# Altium PCB PCB1.pcbdoc (part 2 of 3)
Units mm, origin at the board's own origin, x right, y up, seen from the top; angles counter-clockwise.
Board outline 85.01 x 107.37 mm, 4 copper layers (Top Layer, Inner1, Inner2, Bottom Layer); 103 components, 145 nets, 649 pads, 270 vias.
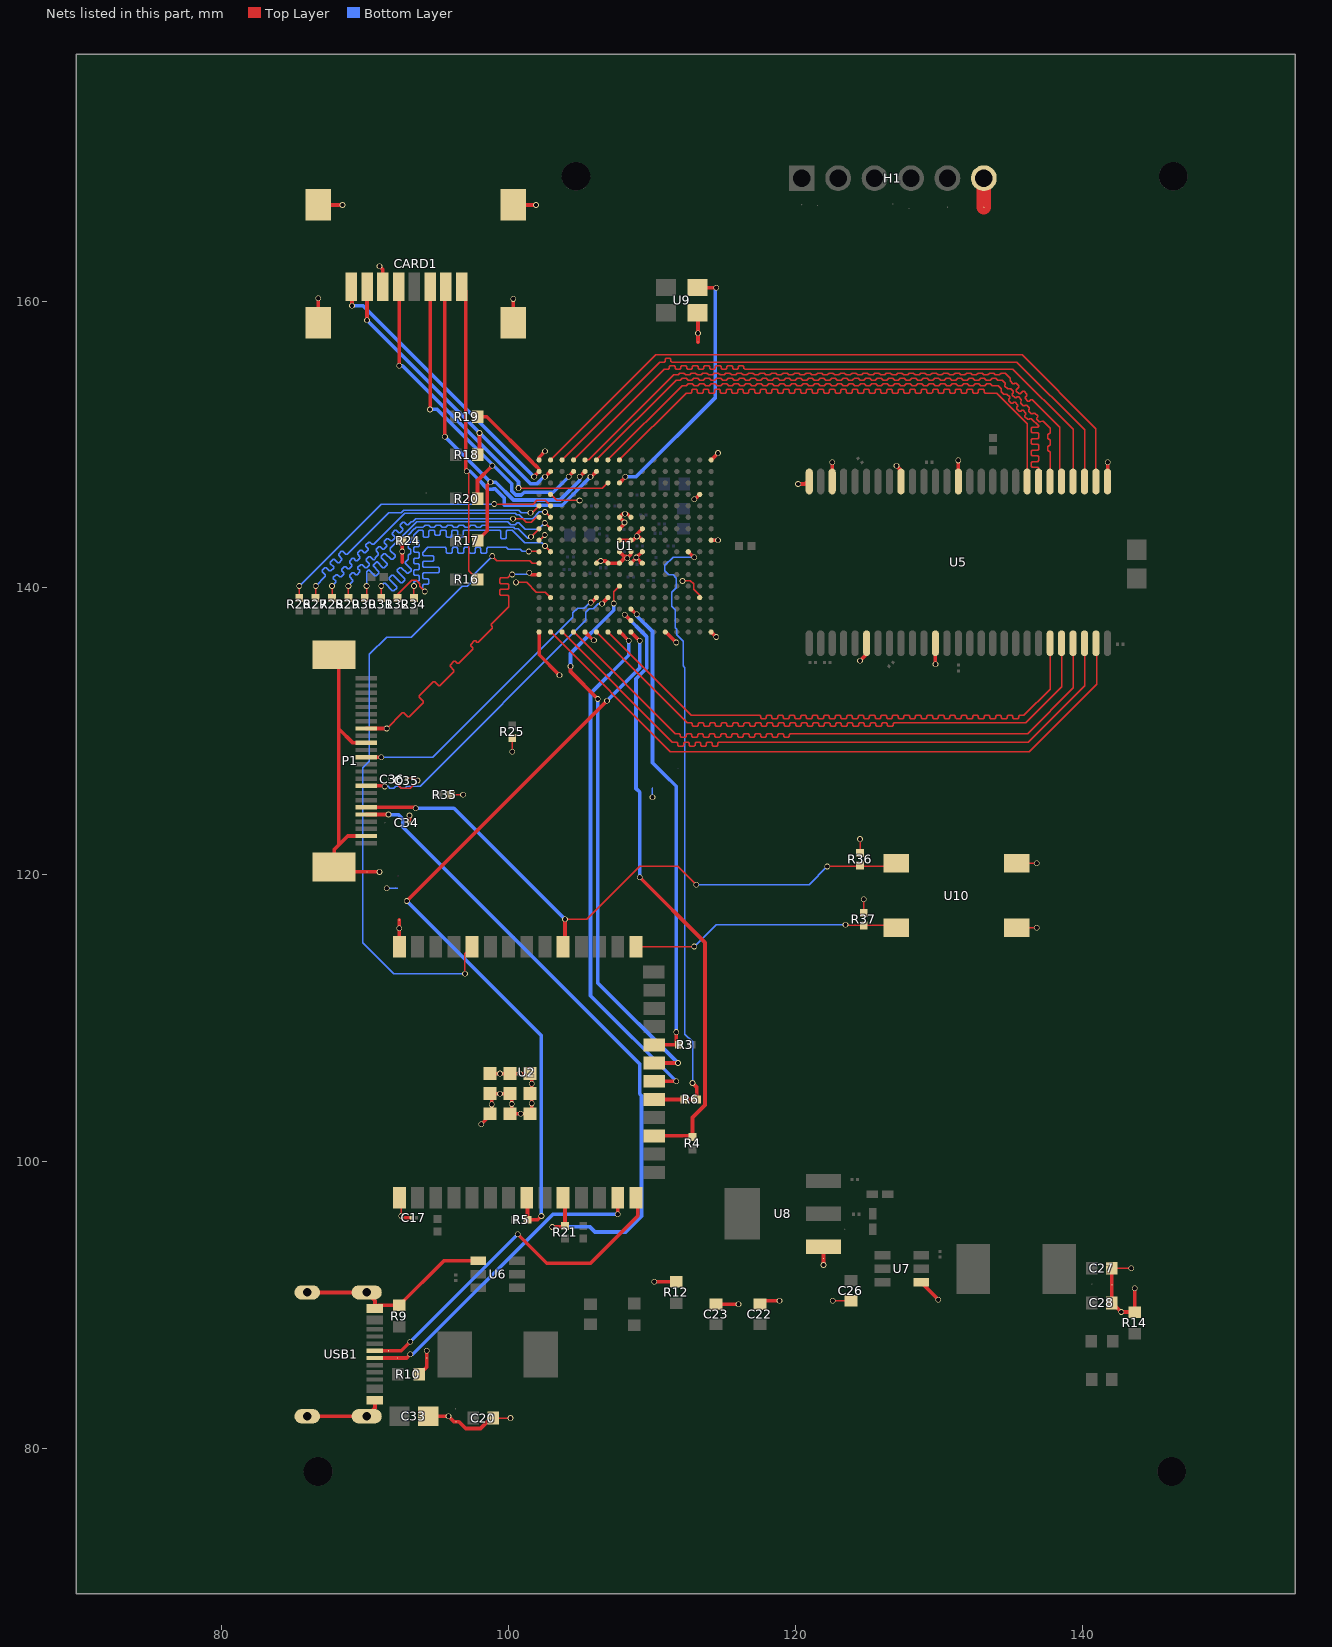
[diagram p4: the nets of this part, all layers, seen from the top]

## Via types
v1: diameter 0.4, hole 0.3, Top Layer to Bottom Layer, 254 vias
v2: diameter 0.61, hole 0.305, Top Layer to Bottom Layer, 16 vias

## Nets (pads, with @x,y where several pads share a name; then routed paths per layer and width w, separated by ;. In a path a pad name is that pad's centre, name@x,y a point inside that pad or via, vN(x,y) a via of type N, cw(c..) or ccw(c..) an arc to the next point about the centre after c; other vN are vias at no path point) (continued)
CCLK: R6.1 R6.2 U1.J14 U2.19 | length 44.3
  Top Layer w0.254: U2.19@110.292,104.318 R6.1@112.267,104.318 R6.2@113.133,104.318 113.133,105.155 v1(112.827,105.461) ; U1.J14@112.528,142.526 112.911,142.143 v1(112.954,142.143)
  Bottom Layer w0.1: v1(112.827,105.461) 112.827,108.34 112.296,108.871 112.296,134.44 112.171,134.565 112.171,136.277 111.714,136.734 111.714,137.124 111.615,137.223 111.615,138.479 111.386,138.708 111.386,139.707 111.705,140.026 111.705,140.68 111.47,140.915 111.184,140.915 110.899,141.199 110.899,141.567 111.475,142.143 v1(112.954,142.143)
CRYSTAL: U1.C8 U9.3 | length 18.2
  Top Layer w0.254: U1.C8@107.728,147.326 108.128,147.726 v1(108.128,147.752) ; U9.3@113.165,160.946 v1(114.478,160.946)
  Bottom Layer w0.254: v1(108.128,147.752) 108.89,147.752 114.425,153.287 114.425,160.893 v1(114.478,160.946)
D0: R26.1 U1.E2 | length 21
  Top Layer w0.1: R26.1@85.395,139.295 v1(85.395,140.132) ; v1@98.984,145.847 101.709,145.847 101.97,146.108 102.546,146.108 U1.E2@102.928,145.726
  Bottom Layer w0.1: v1(85.395,140.132) 91.11,145.847 v1(98.994,145.847)
D1: R27.1 U1.E1 | length 21.1
  Top Layer w0.1: R27.1@86.538,139.295 v1(86.538,140.132) ; v1(101.524,145.241) 101.643,145.241 U1.E1@102.128,145.726
  Bottom Layer w0.1: v1(86.538,140.132) 87.223,140.817 87.223,140.917 87.006,141.135 87.006,141.235 87.188,141.417 87.288,141.417 87.506,141.2 87.606,141.2 87.789,141.383 87.789,141.483 87.571,141.7 87.571,141.8 87.754,141.983 87.854,141.983 88.072,141.766 88.172,141.766 88.354,141.948 88.354,142.048 88.137,142.266 88.137,142.366 88.32,142.549 88.42,142.549 88.637,142.331 88.737,142.331 91.647,145.241 92.507,145.241 92.685,145.419 100.717,145.419 100.895,145.241 v1(101.524,145.241)
D2: R28.1 U1.F2 | length 21.5
  Top Layer w0.1: R28.1@87.681,139.295 v1(87.681,140.132) ; v1(102.537,145.296) 102.558,145.296 U1.F2@102.928,144.926
  Bottom Layer w0.1: v1(87.681,140.132) 87.935,140.386 87.935,140.486 87.781,140.64 87.781,140.74 87.964,140.923 88.064,140.923 88.218,140.769 88.318,140.769 88.501,140.952 88.501,141.052 88.347,141.206 88.347,141.306 88.53,141.489 88.63,141.489 88.784,141.335 88.884,141.335 89.066,141.517 89.066,141.617 88.912,141.771 88.912,141.871 89.095,142.054 89.195,142.054 89.349,141.9 89.449,141.9 89.632,142.083 89.632,142.183 89.478,142.337 89.478,142.437 89.661,142.62 89.761,142.62 89.915,142.466 90.015,142.466 90.198,142.649 90.198,142.749 90.044,142.903 90.044,143.003 90.227,143.186 90.327,143.186 90.481,143.032 90.581,143.032 92.768,145.219 100.465,145.219 100.575,145.11 100.743,145.11 101.014,144.839 101.691,144.839 102.147,145.296 v1(102.537,145.296)
D3: R29.1 U1.F1 | length 20.7
  Top Layer w0.1: R29.1@88.824,139.295 v1(88.824,140.132) ; v1(100.299,144.817) 100.998,144.817 101.23,144.585 101.564,144.585 101.922,144.943 102.111,144.943 U1.F1@102.128,144.926
  Bottom Layer w0.1: v1(88.824,140.132) 89.143,140.451 89.143,140.551 88.926,140.769 88.926,140.869 89.109,141.052 89.209,141.052 89.328,140.932 89.428,140.932 89.611,141.115 89.611,141.215 89.491,141.334 89.491,141.434 89.674,141.617 89.774,141.617 89.992,141.4 90.092,141.4 90.275,141.583 90.275,141.683 90.057,141.9 90.057,142 90.24,142.183 90.34,142.183 90.558,141.966 90.658,141.966 90.71,142.018 90.71,142.114 90.922,142.327 90.922,142.427 90.753,142.596 90.753,142.696 90.936,142.879 91.036,142.879 91.205,142.709 91.305,142.709 91.488,142.892 91.488,142.992 91.319,143.162 91.319,143.262 91.501,143.444 91.601,143.444 91.771,143.275 91.871,143.275 92.054,143.458 92.054,143.558 91.884,143.727 91.884,143.827 92.067,144.01 92.167,144.01 92.336,143.841 92.436,143.841 92.619,144.024 92.619,144.124 92.45,144.293 92.45,144.393 92.633,144.576 92.733,144.576 92.902,144.406 93.002,144.406 93.211,144.615 93.307,144.615 93.509,144.817 v1(100.299,144.817)
D4: R30.1 U1.G2 | length 21.3
  Top Layer w0.1: R30.1@89.967,139.295 90.094,139.422 v1(90.094,140.132) ; v1(102.522,144.529) 102.525,144.529 U1.G2@102.928,144.126
  Bottom Layer w0.1: v1(90.094,140.132) 90.094,141.119 90.24,141.265 90.258,141.265 90.67,140.853 90.77,140.853 90.953,141.036 90.953,141.136 90.541,141.548 90.541,141.566 90.806,141.831 90.824,141.831 91.236,141.419 91.336,141.419 91.519,141.602 91.519,141.702 91.107,142.114 91.107,142.214 91.29,142.397 91.39,142.397 91.802,141.985 91.902,141.985 92.084,142.168 92.084,142.268 91.745,142.607 91.745,142.77 92.171,143.196 92.271,143.196 92.489,142.978 92.589,142.978 92.772,143.16 92.772,143.26 92.554,143.479 92.554,143.579 93.592,144.617 99.93,144.617 100.132,144.415 100.465,144.415 100.592,144.542 100.701,144.542 101.153,144.09 102.082,144.09 v1(102.522,144.529)
D5: R31.1 U1.G1 | length 21
  Top Layer w0.1: R31.1@91.11,139.295 v1(91.11,140.132) ; v1(101.558,143.561) 101.563,143.561 U1.G1@102.128,144.126
  Bottom Layer w0.1: v1(91.11,140.132) 91.289,140.311 91.389,140.311 91.898,139.802 91.998,139.802 92.181,139.985 92.181,140.085 91.672,140.594 91.672,140.694 91.854,140.876 91.954,140.876 92.464,140.367 92.564,140.367 92.746,140.55 92.746,140.65 92.237,141.159 92.237,141.259 92.401,141.423 92.501,141.423 92.913,141.011 93.013,141.011 93.196,141.193 93.196,141.293 92.784,141.706 92.784,141.806 92.984,142.006 92.984,142.264 93.055,142.334 93.096,142.334 93.167,142.405 93.167,142.664 93.096,142.734 93.055,142.734 92.984,142.805 92.984,143.064 93.055,143.134 93.096,143.134 93.167,143.205 93.167,143.464 93.096,143.534 93.055,143.534 92.984,143.605 92.984,143.679 93.43,144.125 93.452,144.125 93.542,144.215 94.027,144.215 94.098,144.286 94.098,144.317 94.169,144.388 94.427,144.388 94.498,144.317 94.498,144.286 94.569,144.215 94.827,144.215 94.898,144.286 94.898,144.317 94.969,144.388 95.227,144.388 95.298,144.317 95.298,144.286 95.369,144.215 95.627,144.215 95.698,144.286 95.698,144.317 95.769,144.388 96.027,144.388 96.098,144.317 96.098,144.286 96.169,144.215 96.427,144.215 96.498,144.286 96.498,144.317 96.569,144.388 96.827,144.388 96.898,144.317 96.898,144.286 96.969,144.215 97.227,144.215 97.298,144.286 97.298,144.317 97.369,144.388 97.627,144.388 97.698,144.317 97.698,144.286 97.769,144.215 98.027,144.215 98.098,144.286 98.098,144.317 98.169,144.388 98.427,144.388 98.498,144.317 98.498,144.286 98.569,144.215 100.353,144.215 100.443,144.125 100.672,144.125 101.326,143.471 101.468,143.471 v1(101.558,143.561)
D6: R32.1 U1.J1 | length 20.9
  Top Layer w0.1: R32.1@92.253,139.295 92.253,139.558 93.229,140.534 93.563,140.534 93.798,140.299 93.798,140.111 v1(94.158,139.751) ; v1(101.397,142.545) 102.109,142.545 U1.J1@102.128,142.526
  Bottom Layer w0.1: v1(94.158,139.751) 94.01,139.899 94.01,140.183 94.081,140.254 94.345,140.254 94.416,140.324 94.416,140.583 94.345,140.654 94.081,140.654 94.01,140.724 94.01,140.983 94.081,141.054 95.103,141.054 95.174,141.124 95.174,141.383 95.103,141.454 94.081,141.454 94.01,141.524 94.01,141.783 94.081,141.854 94.722,141.854 94.793,141.924 94.793,142.183 94.722,142.254 94.081,142.254 94.01,142.324 94.01,142.458 94.372,142.82 95.59,142.82 95.661,142.749 95.661,142.489 95.731,142.418 95.99,142.418 96.061,142.489 96.061,142.749 96.131,142.82 96.39,142.82 96.461,142.749 96.461,142.489 96.531,142.418 96.79,142.418 96.861,142.489 96.861,142.749 96.931,142.82 97.19,142.82 97.261,142.749 97.261,142.489 97.331,142.418 97.59,142.418 97.661,142.489 97.661,142.749 97.731,142.82 97.99,142.82 98.061,142.749 98.061,142.489 98.131,142.418 98.39,142.418 98.461,142.489 98.461,142.749 98.531,142.82 99.852,142.82 99.979,142.693 100.802,142.693 100.95,142.545 v1(101.397,142.545)
D7: R34.1 U1.J2 | length 21
  Top Layer w0.1: R34.1@93.396,139.295 v1(93.396,140.132) ; v1(102.54,142.926) 102.54,142.914 U1.J2@102.928,142.526
  Bottom Layer w0.1: v1(93.396,140.132) 93.396,140.406 93.467,140.477 93.71,140.477 93.781,140.548 93.781,140.806 93.71,140.877 93.467,140.877 93.396,140.948 93.396,141.206 93.467,141.277 93.71,141.277 93.781,141.348 93.781,141.606 93.71,141.677 93.467,141.677 93.396,141.748 93.396,142.006 93.467,142.077 93.71,142.077 93.781,142.148 93.781,142.406 93.71,142.477 93.467,142.477 93.396,142.548 93.396,142.806 93.467,142.877 93.71,142.877 93.781,142.948 93.781,143.206 93.71,143.277 93.467,143.277 93.396,143.348 93.396,143.688 93.723,144.015 93.972,144.015 94.042,143.944 94.042,143.606 94.113,143.535 94.372,143.535 94.442,143.606 94.442,143.944 94.513,144.015 94.772,144.015 94.842,143.944 94.842,143.747 94.913,143.677 95.172,143.677 95.242,143.747 95.242,143.944 95.313,144.015 95.572,144.015 95.642,143.944 95.642,143.606 95.713,143.535 95.972,143.535 96.042,143.606 96.042,143.944 96.113,144.015 96.372,144.015 96.442,143.944 96.442,143.606 96.513,143.535 96.772,143.535 96.842,143.606 96.842,143.944 96.913,144.015 99.367,144.015 99.437,143.944 99.437,143.505 99.508,143.434 99.767,143.434 99.837,143.505 99.837,143.944 99.908,144.015 100.271,144.015 101.127,143.159 102.307,143.159 v1(102.54,142.926)
DIN: U1.T8 U2.20 | length 36.6
  Top Layer w0.254: U1.T8@107.728,136.926 107.778,136.926 v1(108.382,136.322) ; U2.20@110.292,105.588 v1(111.684,105.588)
  Bottom Layer w0.254: v1(108.382,136.322) 108.382,135.306 105.715,132.639 105.715,111.557 v1(111.684,105.588)
DN: pad.55@92.253,86.284 U2.13 USB1.A7 | length 22.3
  Top Layer w0.254: USB1.A7@90.678,86.288 91.975,86.288 92.892,86.288 v1(93.142,86.538) ; v1(107.62,96.317) 107.62,97.351 U2.13@107.742,97.473
  Bottom Layer w0.254: v1(93.142,86.538) 93.311,86.538 103.09,96.317 v1(107.62,96.317)
DONE: pad.55@110.865,126.981 R3.2 U1.P9 U2.22 | length 33.4
  Top Layer w0.254: U1.P9@108.528,138.526 108.898,138.156 v1(108.946,138.156) ; U2.22@110.292,108.128 R3.2@111.886,108.128 111.684,108.33 v1(111.684,109.017)
  Bottom Layer w0.254: v1(108.946,138.156) 108.946,138.044 110.033,136.957 110.033,127.813 pad.55@110.865,126.981 111.684,126.162 v1(111.684,109.017)
DOUT: U1.M8 U2.21 | length 39.3
  Top Layer w0.1: v1(107.328,138.911) 107.328,139.726 U1.M8@107.728,140.126
  Top Layer w0.254: v1(104.318,134.544) 104.318,134.163 v1(106.223,132.258) ; U2.21@110.292,106.858 v1(111.811,106.858)
  Bottom Layer w0.254: v1(104.318,134.544) 104.318,135.433 107.328,138.443 v1(107.328,138.911) ; v1(106.223,132.258) 106.223,112.446 v1(111.811,106.858)
DP: pad.55@91.618,86.792 U2.14 USB1.A6 | length 25.2
  Top Layer w0.254: USB1.A6@90.678,86.788 91.93,86.788 92.503,86.788 v1(93.142,87.427) ; v1(100.635,94.92) 102.667,92.888 105.715,92.888 109.012,96.185 U2.14@109.012,97.473
  Bottom Layer w0.254: v1(93.142,87.427) v1(100.635,94.92)
GND: C17.1 C20.1 C22.1 C23.1 C26.1 C27.1 C28.1 C33.1 C34.2 C35.2 C36.2 CARD1.6 CARD1.9 CARD1.10 CARD1.11 CARD1.12 H1.6 P1.2 P1.15 P1.25 P1.26 pad.55@90.131,120.193 pad.55@92.126,119.05 pad.55@92.375,116.832 pad.55@94.285,86.284 pad.55@96.317,81.839 pad.55@110.033,126.035 pad.55@113.208,157.15 pad.55@121.965,93.234 pad.55@133.147,166.548 pad.55@142.081,91.393 R9.1 R10.1 R12.1 R14.1 R24.1 R25.1 R35.2 R36.2 R37.2 U1.A1 U1.A16 U1.D2 U1.D15 U1.F8 U1.F9 U1.G8 U1.G10 U1.H1 U1.H8 U1.H9 U1.H10 U1.H16 U1.J8 U1.J9 U1.J10 U1.K6 U1.K7 U1.K8 U1.K9 U1.K10 U1.N2 U1.N15 U1.T1 U1.T5 U1.T12 U1.T16 U2.1 U2.40 U2.41 U5.6 U5.12 U5.28 U5.41 U5.46 U5.52 U5.54 U6.4 U7.4 U8.1 U9.2 U10.2 U10.4 USB1.1 USB1.2 USB1.3 USB1.4 USB1.A1B12 USB1.B1A12 | length 143
  Top Layer w0.1: C36.2@92.067,126.67 92.067,126.475 92.501,126.041 93.148,126.041 93.65,126.543 v1(93.65,126.564) 93.476,126.738 C35.2@92.888,126.738 ; U2.1@92.375,97.473 92.502,97.346 v1(92.502,96.19) ; R35.2@95.974,125.576 v1(96.825,125.576) ; C20.1@98.922,82.093 v1(100.127,82.093) ; v1(100.254,128.575) R25.1@100.254,129.539 ; v1(100.508,140.386) 101.27,140.386 101.942,139.714 102.54,139.714 U1.N2@102.928,139.326 ; 102.286,143.434 102.528,143.676 v1(102.528,143.688) ; U1.D2@102.928,146.526 103.353,146.101 103.563,146.101 103.57,146.108 104.686,146.108 104.693,146.101 v1@104.953,146.101 ; v1(112.128,140.478) 112.267,140.478 112.297,140.508 112.686,140.508 112.91,140.284 112.91,139.895 113.328,139.477 U1.N15@113.328,139.326 ; v1(122.606,90.283) C26.1@123.876,90.283 ; R36.2@124.511,121.515 v1(124.511,122.479) ; R37.2@124.765,117.324 v1(124.765,118.288) ; U10.4@135.442,116.292 v1(136.83,116.292) ; U10.2@135.442,120.792 v1(136.83,120.792) ; C27.1@142.081,92.546 v1(143.434,92.546)
  Top Layer w0.254: USB1.4@85.954,82.218 USB1.2@90.103,82.218 90.678,82.793 USB1.B1A12@90.678,83.338 ; USB1.3@85.954,90.858 USB1.1@90.103,90.858 90.678,90.283 USB1.A1B12@90.678,89.738 90.899,89.958 R9.1@92.38,89.958 95.498,93.076 U6.4@97.888,93.076 ; CARD1.10@86.723,158.511 v1(86.723,160.202) ; CARD1.9@86.723,166.711 v1(88.408,166.711) ; P1.25@87.819,135.341 88.153,135.007 88.153,130.184 ; P1.2@90.08,122.695 88.786,122.695 88.153,122.062 ; P1.15@90.081,129.191 89.147,129.191 88.153,130.184 ; v1(90.996,162.438) 91.223,162.211 CARD1.6@91.223,161.011 ; v1(91.001,120.193) pad.55@90.131,120.193 88.172,120.193 P1.26@87.826,120.539 87.826,121.735 88.153,122.062 ; pad.55@92.375,116.832 v1(92.375,116.26) 92.375,115.1 U2.40@92.502,114.973 ; v1(92.502,96.19) 92.629,96.063 C17.1@93.201,96.063 ; 92.582,141.783 v1(92.582,142.539) R24.1@92.582,143.307 ; C34.2@93.083,123.622 v1(93.083,124.13) ; R10.1@93.768,85.141 94.285,85.658 pad.55@94.285,86.284 v1(94.285,86.792) ; C33.1@94.396,82.22 v1(95.809,82.22) 96.19,81.839 96.531,81.839 97.006,81.364 98.038,81.364 98.767,82.093 C20.1@98.922,82.093 ; v1(98.096,102.597) 98.822,103.323 v1(98.822,103.976) 98.822,104.723 v1(99.398,104.723) 100.222,104.723 v1(100.222,104.001) 100.222,103.323 v1(100.842,103.323) 101.622,103.323 v1(101.622,104.045) v1(101.622,105.407) 101.622,106.123 v1(100.773,106.123) v1(99.398,106.123) U2.41@98.822,106.123 ; CARD1.11@100.323,158.511 v1(100.323,160.16) ; CARD1.12@100.323,166.711 v1(101.905,166.711) ; U1.T1@102.128,136.926 102.128,135.337 v1(103.556,133.909) ; U1.A1@102.128,148.926 102.128,149.118 v1(102.54,149.53) ; U1.T5@105.328,136.926 105.911,136.343 v1(105.948,136.343) ; U1.K6@106.128,141.726 106.282,141.881 v1(106.427,141.881) 106.774,141.881 U1.K7@106.928,141.726 U1.K8@107.728,141.726 v1@108.19,142.188 ; U1.J8@107.728,142.526 108.066,142.188 v1@108.19,142.188 ; U1.H8@107.728,143.326 U1.H9@108.528,143.326 108.679,143.326 v1(108.947,143.594) ; U1.G8@107.728,144.126 108.08,144.478 v1(108.08,144.557) 108.08,144.574 U1.F8@107.728,144.926 107.982,145.18 v1(108.119,145.18) 108.274,145.18 U1.F9@108.528,144.926 ; U1.K9@108.528,141.726 108.907,142.105 v1(108.907,142.118) ; U1.J9@108.528,142.526 108.528,142.329 v1(108.269,142.069) 108.269,142.109 v1@108.19,142.188 ; U1.K10@109.172,141.754 109.172,141.852 v1(108.907,142.118) ; U1.J10@109.328,142.526 109.315,142.526 v1(108.907,142.118) ; U1.H10@109.328,143.326 109.06,143.594 v1(108.947,143.594) ; U1.G10@109.328,144.126 108.947,143.745 v1(108.947,143.594) ; v1(110.16,91.609) R12.1@111.684,91.609 ; U1.T12@110.928,136.926 110.953,136.926 v1(111.685,136.194) ; v1@112.954,146.228 113.03,146.228 U1.D15@113.328,146.526 ; U9.2@113.165,159.196 113.208,159.153 v1(113.208,157.755) pad.55@113.208,157.15 ; U1.T16@114.128,136.926 v1(114.478,136.576) ; U1.H16@114.128,143.326 v1(114.605,143.328) ; U1.A16@114.128,148.926 v1(114.605,149.403) ; C23.1@114.478,90.032 v1(116.032,90.032) ; C22.1@117.526,90.032 117.777,90.283 v1(118.897,90.283) ; v1(120.193,147.244) 120.661,147.244 U5.54@120.969,147.552 ; v1(121.965,92.771) pad.55@121.965,93.234 U8.1@121.965,94.046 ; U5.52@122.569,147.552 v1(122.569,148.768) ; v1(124.511,134.925) 124.969,135.383 U5.6@124.969,136.141 ; v1(127.051,148.514) 127.369,148.196 U5.46@127.369,147.425 ; U7.4@128.782,91.557 129.972,90.367 v1(129.972,90.348) ; v1(129.769,134.671) U5.12@129.769,136.141 ; U5.41@131.369,147.552 v1(131.369,148.895) ; U5.28@141.769,147.425 141.783,147.439 v1(141.783,148.768) ; C27.1@142.081,92.546 pad.55@142.081,91.393 C28.1@142.081,90.133 v1(142.725,89.489) R14.1@143.667,89.489 v1(143.667,91.149) ; 88.153,122.062 88.153,130.184
  Top Layer w1: pad.55@133.147,166.548 H1.6@133.147,168.58
  Bottom Layer w0.1: v1(91.491,119.05) 92.253,119.05 ; v1(110.033,125.4) pad.55@110.033,126.035
  other v1: 104.952,146.102 112.954,146.181
HREF: P1.9 U1.N7 | length 22.9
  Top Layer w0.254: P1.9@90.08,126.194 91.323,126.194 v1(91.365,126.152) ; v1@106.477,138.862 106.477,138.875 U1.N7@106.928,139.326
  Bottom Layer w0.1: v1(91.365,126.152) 91.594,126.152 91.712,126.035 91.985,126.035 92.112,126.162 92.385,126.162 92.512,126.035 92.785,126.035 92.912,126.162 93.826,126.162 105.394,137.73 105.394,138.313 105.629,138.548 105.909,138.548 106.257,138.896 v1(106.511,138.896)
INITN: pad.55@93.673,117.376 R5.1 U1.T9 U2.8 | length 54.3
  Top Layer w0.254: v1(92.888,118.161) v1(106.858,132.131) ; U2.8@101.392,97.473 101.322,97.403 R5.1@101.322,95.936 102.032,95.936 v1(102.286,96.19) ; U1.T9@108.528,136.926 109.132,136.322 v1(109.144,136.322)
  Bottom Layer w0.254: v1(92.888,118.161) pad.55@93.673,117.376 102.286,108.763 v1(102.286,96.19) ; v1(106.858,132.131) 109.144,134.417 v1(109.144,136.322)
M_CLK: CARD1.5 U1.C7 | length 24
  Top Layer w0.1: v1(100.69,146.962) 100.707,146.944 106.546,146.944 U1.C7@106.928,147.326
  Top Layer w0.254: CARD1.5@92.323,161.011 92.38,160.954 v1(92.38,155.499)
  Bottom Layer w0.254: v1(92.38,155.499) 92.592,155.499 100.69,147.401 v1(100.69,146.962)
M_CMD: CARD1.3 R20.1 U1.B4 | length 24.7
  Top Layer w0.254: v1(94.523,152.451) CARD1.3@94.523,161.011 ; R20.1@97.832,146.228 97.832,147.489 v1(98.857,148.514) ; v1(104.191,147.752) 104.191,147.789 U1.B4@104.528,148.126
  Bottom Layer w0.254: v1(94.523,152.451) 95.031,152.451 100.211,147.271 100.211,146.763 100.491,146.483 100.888,146.483 101.087,146.682 103.121,146.682 v1(104.191,147.752)
M_D0: CARD1.7 R18.1 U1.B2 | length 21.8
  Top Layer w0.254: v1(90.123,158.674) CARD1.7@90.123,161.011 ; R18.1@97.832,149.276 97.968,149.412 v1(97.968,150.8) ; v1(102.54,147.752) 102.554,147.752 U1.B2@102.928,148.126
  Bottom Layer w0.254: v1(90.123,158.674) 101.524,147.273 101.976,147.273 102.455,147.752 v1(102.54,147.752)
M_D1: CARD1.8 R19.1 U1.B1 | length 25.5
  Top Layer w0.254: CARD1.8@89.023,161.011 89.078,160.956 v1(89.078,159.69) ; R19.1@97.832,151.943 98.467,151.943 101.669,148.741 101.669,148.736 101.938,148.467 101.943,148.467 102.096,148.315 U1.B1@102.096,148.093 ; v1(101.778,147.752) 101.778,147.776 U1.B1@102.096,148.093 ; U1.B1@102.128,148.126 U1.B1@102.096,148.093
  Bottom Layer w0.254: v1(89.078,159.69) 89.84,159.69 v1(101.778,147.752)
M_D2: CARD1.1 R16.1 U1.B6 | length 32.2
  Top Layer w0.1: v1(97.079,148.133) 97.227,147.985 97.227,141.19 R16.1@97.828,140.589
  Top Layer w0.254: CARD1.1@96.723,161.011 97.008,160.726 97.008,148.204 v1(97.079,148.133) ; v1(105.715,147.752) 105.754,147.752 U1.B6@106.128,148.126
  Bottom Layer w0.254: v1(97.079,148.133) 97.333,148.133 98.251,147.215 98.251,147.173 98.532,146.892 98.928,146.892 98.942,146.906 99.067,146.906 99.704,146.269 99.704,145.775 103.738,145.775 v1(105.715,147.752)
M_D3: CARD1.2 R17.1 U1.B5 | length 27.5
  Top Layer w0.254: v1(95.555,150.546) 95.555,160.943 CARD1.2@95.623,161.011 ; R17.1@97.832,143.307 98.515,143.989 98.515,147.156 v1(98.73,147.371) ; v1(104.953,147.752) U1.B5@105.328,148.126
  Bottom Layer w0.254: v1(95.555,150.546) v1(98.73,147.371) 99.102,147.371 100.345,146.129 103.591,146.129 104.953,147.491 v1(104.953,147.752)
MCLK: P1.13 U1.N6 | length 20.8
  Top Layer w0.254: P1.13@90.08,128.194 v1(91.11,128.194) ; v1@105.715,138.989 105.791,138.989 U1.N6@106.128,139.326
  Bottom Layer w0.1: v1(91.11,128.194) 94.717,128.194 104.482,137.96 104.482,138.264 104.805,138.587 105.276,138.587 105.664,138.975 v1(105.729,138.975)
PCLK: P1.17 U1.L1 | length 22.6
  Top Layer w0.1: v1(91.491,130.194) 92.586,131.29 92.686,131.29 92.956,131.02 93.056,131.02 94.034,131.997 94.034,132.097 93.764,132.367 93.764,132.467 94.742,133.445 94.842,133.445 95.112,133.175 95.212,133.175 96.189,134.153 96.189,134.253 95.919,134.522 95.919,134.622 96.17,134.874 96.27,134.874 96.409,134.736 96.509,134.736 97.486,135.713 97.486,135.813 97.348,135.951 97.348,136.051 97.601,136.304 97.701,136.304 97.781,136.224 97.881,136.224 98.858,137.202 98.858,137.302 98.779,137.382 98.779,137.482 100,138.703 100,139.422 99.929,139.492 99.441,139.492 99.37,139.563 99.37,139.822 99.441,139.892 99.929,139.892 100,139.963 100,140.222 99.929,140.292 99.441,140.292 99.37,140.363 99.37,140.622 99.441,140.692 99.929,140.692 100.175,140.938 v1(100.254,140.938)
  Top Layer w0.254: P1.17@90.079,130.194 v1(91.491,130.194) ; v1(101.442,141.066) 101.581,140.926 U1.L1@102.128,140.926
  Bottom Layer w0.1: v1(100.254,140.938) 101.314,140.938 v1(101.442,141.066)
PROGRAM: R37.1 U2.27 U10.3 | length 18.9
  Top Layer w0.1: U2.27@108.885,114.973 112.941,114.973 v1(112.954,114.986) ; v1(123.495,116.51) 123.547,116.458 R37.1@124.765,116.458 126.876,116.458 U10.3@127.042,116.292
  Bottom Layer w0.1: v1(112.954,114.986) 114.478,116.51 v1(123.495,116.51)
PROGRAMN: pad.55@108.89,126.014 R4.2 U1.R9 U2.17 | length 42.9
  Top Layer w0.254: v1(108.091,138.137) 108.117,138.137 U1.R9@108.528,137.726 ; v1(109.144,119.812) 113.695,115.261 113.695,103.932 112.827,103.065 R4.2@112.827,101.703 112.752,101.778 U2.17@110.292,101.778
  Bottom Layer w0.254: v1(108.091,138.137) 109.623,136.605 109.623,134.395 108.89,133.662 pad.55@108.89,126.014 109.144,125.76 v1(109.144,119.812)
RESET: P1.6 pad.55@99.749,121.074 R36.1 U2.31 U10.1 | length 44.8
  Top Layer w0.1: v1(103.932,116.891) 105.461,116.891 109.144,120.574 111.811,120.574 v1(113.081,119.304) ; v1(122.225,120.574) 126.824,120.574 U10.1@127.042,120.792
  Top Layer w0.254: P1.6@90.08,124.695 93.466,124.695 v1(93.523,124.638) ; U2.31@103.932,114.973 v1(103.932,116.891)
  Bottom Layer w0.1: v1(113.081,119.304) 120.955,119.304 v1(122.225,120.574)
  Bottom Layer w0.254: v1(93.523,124.638) 96.185,124.638 pad.55@99.749,121.074 v1(103.932,116.891)
RX: U1.K1 U2.36 | length 45.5
  Top Layer w0.1: v1(96.952,113.081) 96.952,114.47 U2.36@97.455,114.973 ; v1(98.858,142.219) 99.186,141.891 101.485,141.891 101.65,141.726 U1.K1@102.128,141.726
  Bottom Layer w0.1: v1(96.952,113.081) 91.999,113.081 89.84,115.24 89.84,127.468 90.28,127.908 90.28,135.365 91.491,136.576 93.215,136.576 96.75,140.111 97.119,140.111 97.354,140.346 97.354,140.715 v1(98.858,142.219)
SCL: P1.5 R21.1 U2.10 | length 46.9
  Top Layer w0.254: P1.5@90.08,124.194 v1(91.618,124.194) ; v1(103.048,95.428) 103.885,95.428 R21.1@103.937,95.48 ; U2.10@103.932,97.473 103.937,97.468 R21.1@103.937,95.555
  Bottom Layer w0.254: v1(91.618,124.194) 91.745,124.194 91.766,124.174 92.324,124.174 92.605,123.893 92.605,123.334 109.144,106.795 109.144,104.706 109.271,104.579 109.271,96.19 108.157,95.076 106.025,95.076 105.673,95.428 v1(103.048,95.428)
SD_A0: U1.T6 U5.23 | length 45.3
  Top Layer w0.1: U1.T6@106.128,136.926 112.447,130.607 112.747,130.607 112.818,130.536 112.818,130.424 112.888,130.353 113.147,130.353 113.218,130.424 113.218,130.536 113.288,130.607 113.547,130.607 113.618,130.536 113.618,130.424 113.688,130.353 113.947,130.353 114.018,130.424 114.018,130.536 114.088,130.607 114.347,130.607 114.418,130.536 114.418,130.424 114.488,130.353 114.747,130.353 114.818,130.424 114.818,130.536 114.888,130.607 115.147,130.607 115.218,130.536 115.218,130.424 115.288,130.353 115.547,130.353 115.618,130.424 115.618,130.536 115.688,130.607 115.947,130.607 116.018,130.536 116.018,130.424 116.088,130.353 116.347,130.353 116.418,130.424 116.418,130.536 116.488,130.607 116.747,130.607 116.818,130.536 116.818,130.424 116.888,130.353 117.147,130.353 117.218,130.424 117.218,130.536 117.288,130.607 117.547,130.607 117.618,130.536 117.618,130.424 117.688,130.353 117.947,130.353 118.018,130.424 118.018,130.536 118.088,130.607 118.347,130.607 118.418,130.536 118.418,130.424 118.488,130.353 118.747,130.353 118.818,130.424 118.818,130.536 118.888,130.607 119.147,130.607 119.218,130.536 119.218,130.424 119.288,130.353 119.547,130.353 119.618,130.424 119.618,130.536 119.688,130.607 119.947,130.607 120.018,130.536 120.018,130.424 120.088,130.353 120.347,130.353 120.418,130.424 120.418,130.536 120.488,130.607 120.747,130.607 120.818,130.536 120.818,130.424 120.888,130.353 121.147,130.353 121.218,130.424 121.218,130.536 121.288,130.607 121.547,130.607 121.618,130.536 121.618,130.424 121.688,130.353 121.947,130.353 122.018,130.424 122.018,130.536 122.088,130.607 122.347,130.607 122.418,130.536 122.418,130.424 122.488,130.353 122.747,130.353 122.818,130.424 122.818,130.536 122.888,130.607 123.147,130.607 123.218,130.536 123.218,130.424 123.288,130.353 123.547,130.353 123.618,130.424 123.618,130.536 123.688,130.607 123.947,130.607 124.018,130.536 124.018,130.424 124.088,130.353 124.347,130.353 124.418,130.424 124.418,130.536 124.488,130.607 124.747,130.607 124.818,130.536 124.818,130.424 124.888,130.353 125.147,130.353 125.218,130.424 125.218,130.536 125.288,130.607 125.547,130.607 125.618,130.536 125.618,130.424 125.688,130.353 125.947,130.353 126.018,130.424 126.018,130.536 126.088,130.607 126.347,130.607 126.418,130.536 126.418,130.424 126.488,130.353 126.747,130.353 126.818,130.424 126.818,130.536 126.888,130.607 136.068,130.607 138.569,133.108 U5.23@138.569,136.141
SD_A1: U1.T4 U5.24 | length 45.6
  Top Layer w0.1: U1.T4@104.528,136.926 111.609,129.845 111.909,129.845 111.98,129.774 111.98,129.662 112.05,129.591 112.309,129.591 112.38,129.662 112.38,129.774 112.45,129.845 112.709,129.845 112.78,129.774 112.78,129.662 112.85,129.591 113.109,129.591 113.18,129.662 113.18,129.774 113.25,129.845 113.509,129.845 113.58,129.774 113.58,129.662 113.65,129.591 113.909,129.591 113.98,129.662 113.98,129.774 114.05,129.845 114.309,129.845 114.38,129.774 114.38,129.662 114.45,129.591 114.709,129.591 114.78,129.662 114.78,129.774 114.85,129.845 115.109,129.845 115.18,129.774 115.18,129.662 115.25,129.591 115.509,129.591 115.58,129.662 115.58,129.774 115.65,129.845 115.909,129.845 115.98,129.774 115.98,129.662 116.05,129.591 116.309,129.591 116.38,129.662 116.38,129.774 116.45,129.845 116.709,129.845 116.78,129.774 116.78,129.662 116.85,129.591 117.109,129.591 117.18,129.662 117.18,129.774 117.25,129.845 117.509,129.845 117.58,129.774 117.58,129.662 117.65,129.591 117.909,129.591 117.98,129.662 117.98,129.774 118.05,129.845 118.309,129.845 118.38,129.774 118.38,129.662 118.45,129.591 118.709,129.591 118.78,129.662 118.78,129.774 118.85,129.845 119.109,129.845 119.18,129.774 119.18,129.662 119.25,129.591 119.509,129.591 119.58,129.662 119.58,129.774 119.65,129.845 136.195,129.845 139.37,133.02 U5.24@139.37,136.14
SD_A2: U1.T3 U5.25 | length 45.9
  Top Layer w0.1: U1.T3@103.728,136.926 111.407,129.247 111.73,129.247 111.801,129.176 111.801,129.027 111.871,128.956 112.13,128.956 112.201,129.027 112.201,129.176 112.271,129.247 112.53,129.247 112.601,129.176 112.601,129.027 112.671,128.956 112.93,128.956 113.001,129.027 113.001,129.176 113.071,129.247 113.33,129.247 113.401,129.176 113.401,129.027 113.471,128.956 113.73,128.956 113.801,129.027 113.801,129.176 113.871,129.247 114.13,129.247 114.201,129.176 114.201,129.027 114.271,128.956 114.53,128.956 114.601,129.027 114.601,129.176 114.671,129.247 136.232,129.247 140.169,133.184 U5.25@140.169,136.141
SD_A3: U1.T2 U5.26 | length 46.4
  Top Layer w0.1: U1.T2@102.928,136.926 111.279,128.575 136.322,128.575 141.021,133.274 141.021,136.089 U5.26@140.969,136.141
SD_A4: U1.A2 U5.29 | length 46.9
  Top Layer w0.1: U1.A2@102.928,148.926 110.263,156.261 135.814,156.261 140.969,151.106 U5.29@140.969,147.425
SD_A5: U1.A3 U5.30 | length 45.2
  Top Layer w0.1: U1.A3@103.728,148.926 110.555,155.753 110.855,155.753 110.926,155.824 110.926,155.936 110.996,156.007 111.255,156.007 111.326,155.936 111.326,155.824 111.396,155.753 135.433,155.753 140.169,151.017 U5.30@140.169,147.425
SD_A6: U1.A4 U5.31 | length 45.2
  Top Layer w0.1: U1.A4@104.528,148.926 110.847,155.245 111.147,155.245 111.218,155.316 111.218,155.428 111.288,155.499 111.547,155.499 111.618,155.428 111.618,155.316 111.688,155.245 111.947,155.245 112.018,155.316 112.018,155.428 112.088,155.499 112.347,155.499 112.418,155.428 112.418,155.316 112.488,155.245 112.747,155.245 112.818,155.316 112.818,155.428 112.888,155.499 113.147,155.499 113.218,155.428 113.218,155.316 113.288,155.245 113.547,155.245 113.618,155.316 113.618,155.428 113.688,155.499 113.947,155.499 114.018,155.428 114.018,155.316 114.088,155.245 114.347,155.245 114.418,155.316 114.418,155.428 114.488,155.499 114.747,155.499 114.818,155.428 114.818,155.316 114.888,155.245 115.147,155.245 115.218,155.316 115.218,155.428 115.288,155.499 115.547,155.499 115.618,155.428 115.618,155.316 115.688,155.245 115.947,155.245 116.018,155.316 116.018,155.428 116.088,155.499 116.347,155.499 116.418,155.428 116.418,155.316 116.488,155.245 135.179,155.245 139.369,151.055 U5.31@139.369,147.425
SD_A7: U1.A5 U5.32 | length 45.1
  Top Layer w0.1: U1.A5@105.328,148.926 105.588,148.926 111.526,154.864 111.826,154.864 111.953,154.991 112.226,154.991 112.353,154.864 112.626,154.864 112.753,154.991 113.026,154.991 113.153,154.864 113.426,154.864 113.553,154.991 113.826,154.991 113.953,154.864 114.226,154.864 114.353,154.991 114.626,154.991 114.753,154.864 115.026,154.864 115.153,154.991 115.426,154.991 115.553,154.864 115.826,154.864 115.953,154.991 116.226,154.991 116.353,154.864 116.626,154.864 116.753,154.991 117.026,154.991 117.153,154.864 117.426,154.864 117.553,154.991 117.826,154.991 117.953,154.864 118.226,154.864 118.353,154.991 118.626,154.991 118.753,154.864 119.026,154.864 119.153,154.991 119.426,154.991 119.553,154.864 119.826,154.864 119.953,154.991 120.226,154.991 120.353,154.864 120.626,154.864 120.753,154.991 121.026,154.991 121.153,154.864 121.426,154.864 121.553,154.991 121.826,154.991 121.953,154.864 122.226,154.864 122.353,154.991 122.626,154.991 122.753,154.864 123.026,154.864 123.153,154.991 123.426,154.991 123.553,154.864 123.826,154.864 123.953,154.991 124.226,154.991 124.353,154.864 124.626,154.864 124.753,154.991 125.026,154.991 125.153,154.864 125.426,154.864 125.553,154.991 125.826,154.991 125.953,154.864 126.226,154.864 126.353,154.991 126.626,154.991 126.753,154.864 127.026,154.864 127.153,154.991 127.426,154.991 127.553,154.864 127.826,154.864 127.953,154.991 128.226,154.991 128.353,154.864 128.626,154.864 128.753,154.991 129.026,154.991 129.153,154.864 129.426,154.864 129.553,154.991 129.826,154.991 129.953,154.864 130.226,154.864 130.353,154.991 130.626,154.991 130.753,154.864 131.026,154.864 131.153,154.991 131.426,154.991 131.553,154.864 131.826,154.864 131.953,154.991 132.226,154.991 132.353,154.864 132.626,154.864 132.753,154.991 133.026,154.991 133.153,154.864 133.426,154.864 133.553,154.991 133.826,154.991 133.953,154.864 134.226,154.864 134.353,154.991 134.626,154.991 134.998,154.619 134.998,154.44 135.181,154.257 135.281,154.257 135.293,154.269 135.393,154.269 135.576,154.086 135.576,153.986 135.422,153.832 135.422,153.732 135.604,153.549 135.704,153.549 135.859,153.703 135.959,153.703 136.142,153.52 136.142,153.42 136.036,153.315 136.036,153.215 136.219,153.032 136.319,153.032 136.424,153.138 136.524,153.138 138.442,151.22 138.442,147.552 U5.32@138.569,147.425
SD_A8: U1.A6 U5.33 | length 44.4
  Top Layer w0.1: U1.A6@106.128,148.926 111.685,154.483 111.985,154.483 112.056,154.554 112.056,154.564 112.126,154.635 112.385,154.635 112.456,154.564 112.456,154.554 112.526,154.483 112.785,154.483 112.856,154.554 112.856,154.564 112.926,154.635 113.185,154.635 113.256,154.564 113.256,154.554 113.326,154.483 113.585,154.483 113.656,154.554 113.656,154.564 113.726,154.635 113.985,154.635 114.056,154.564 114.056,154.554 114.126,154.483 114.385,154.483 114.456,154.554 114.456,154.564 114.526,154.635 114.785,154.635 114.856,154.564 114.856,154.554 114.926,154.483 115.185,154.483 115.256,154.554 115.256,154.564 115.326,154.635 115.585,154.635 115.656,154.564 115.656,154.554 115.726,154.483 115.985,154.483 116.056,154.554 116.056,154.564 116.126,154.635 116.385,154.635 116.456,154.564 116.456,154.554 116.526,154.483 116.785,154.483 116.856,154.554 116.856,154.564 116.926,154.635 117.185,154.635 117.256,154.564 117.256,154.554 117.326,154.483 117.585,154.483 117.656,154.554 117.656,154.564 117.726,154.635 117.985,154.635 118.056,154.564 118.056,154.554 118.126,154.483 118.385,154.483 118.456,154.554 118.456,154.564 118.526,154.635 118.785,154.635 118.856,154.564 118.856,154.554 118.926,154.483 119.185,154.483 119.256,154.554 119.256,154.564 119.326,154.635 119.585,154.635 119.656,154.564 119.656,154.554 119.726,154.483 119.985,154.483 120.056,154.554 120.056,154.564 120.126,154.635 120.385,154.635 120.456,154.564 120.456,154.554 120.526,154.483 120.785,154.483 120.856,154.554 120.856,154.564 120.926,154.635 121.185,154.635 121.256,154.564 121.256,154.554 121.326,154.483 121.585,154.483 121.656,154.554 121.656,154.564 121.726,154.635 121.985,154.635 122.056,154.564 122.056,154.554 122.126,154.483 122.385,154.483 122.456,154.554 122.456,154.564 122.526,154.635 122.785,154.635 122.856,154.564 122.856,154.554 122.926,154.483 123.185,154.483 123.256,154.554 123.256,154.564 123.326,154.635 123.585,154.635 123.656,154.564 123.656,154.554 123.726,154.483 123.985,154.483 124.056,154.554 124.056,154.564 124.126,154.635 124.385,154.635 124.456,154.564 124.456,154.554 124.526,154.483 124.785,154.483 124.856,154.554 124.856,154.564 124.926,154.635 125.185,154.635 125.256,154.564 125.256,154.554 125.326,154.483 125.585,154.483 125.656,154.554 125.656,154.564 125.726,154.635 125.985,154.635 126.056,154.564 126.056,154.554 126.126,154.483 126.385,154.483 126.456,154.554 126.456,154.564 126.526,154.635 126.785,154.635 126.856,154.564 126.856,154.554 126.926,154.483 127.185,154.483 127.256,154.554 127.256,154.564 127.326,154.635 127.585,154.635 127.656,154.564 127.656,154.554 127.726,154.483 127.985,154.483 128.056,154.554 128.056,154.564 128.126,154.635 128.385,154.635 128.456,154.564 128.456,154.554 128.526,154.483 128.785,154.483 128.856,154.554 128.856,154.564 128.926,154.635 129.185,154.635 129.256,154.564 129.256,154.554 129.326,154.483 129.585,154.483 129.656,154.554 129.656,154.564 129.726,154.635 129.985,154.635 130.056,154.564 130.056,154.554 130.126,154.483 130.385,154.483 130.456,154.554 130.456,154.564 130.526,154.635 130.785,154.635 130.856,154.564 130.856,154.554 130.926,154.483 131.185,154.483 131.256,154.554 131.256,154.564 131.326,154.635 131.585,154.635 131.656,154.564 131.656,154.554 131.726,154.483 131.985,154.483 132.056,154.554 132.056,154.564 132.126,154.635 132.385,154.635 132.456,154.564 132.456,154.554 132.526,154.483 132.785,154.483 132.856,154.554 132.856,154.564 132.926,154.635 133.185,154.635 133.256,154.564 133.256,154.554 133.326,154.483 133.585,154.483 133.656,154.554 133.656,154.564 133.726,154.635 133.985,154.635 134.056,154.564 134.056,154.554 134.126,154.483 134.417,154.483 134.629,154.271 134.629,154.171 134.617,154.159 134.617,154.059 134.8,153.876 134.9,153.876 134.912,153.888 135.012,153.888 135.195,153.705 135.195,153.605 135.139,153.55 135.139,153.45 135.322,153.267 135.422,153.267 135.478,153.322 135.578,153.322 135.761,153.139 135.761,153.039 135.705,152.984 135.705,152.884 135.888,152.701 135.988,152.701 136.043,152.757 136.143,152.757 136.326,152.574 136.326,152.474 136.271,152.418 136.271,152.318 136.454,152.136 136.554,152.136 136.609,152.191 136.709,152.191 136.892,152.008 136.892,151.908 136.845,151.862 136.845,151.762 137.028,151.579 137.128,151.579 137.175,151.625 137.275,151.625 137.769,151.131 137.769,150.831 137.698,150.76 137.681,150.76 137.61,150.69 137.61,150.431 137.681,150.36 137.698,150.36 137.769,150.29 137.769,149.99 137.698,149.919 137.681,149.919 137.61,149.848 137.61,149.59 137.681,149.519 137.698,149.519 137.769,149.448 U5.33@137.769,147.425
SD_A9: U1.A7 U5.34 | length 45.4
  Top Layer w0.1: U1.A7@106.928,148.926 112.104,154.102 112.404,154.102 112.475,154.173 112.475,154.183 112.546,154.254 112.804,154.254 112.875,154.183 112.875,154.173 112.946,154.102 113.204,154.102 113.275,154.173 113.275,154.183 113.346,154.254 113.604,154.254 113.675,154.183 113.675,154.173 113.746,154.102 114.004,154.102 114.075,154.173 114.075,154.183 114.146,154.254 114.404,154.254 114.475,154.183 114.475,154.173 114.546,154.102 114.804,154.102 114.875,154.173 114.875,154.183 114.946,154.254 115.204,154.254 115.275,154.183 115.275,154.173 115.346,154.102 115.604,154.102 115.675,154.173 115.675,154.183 115.746,154.254 116.004,154.254 116.075,154.183 116.075,154.173 116.146,154.102 116.404,154.102 116.475,154.173 116.475,154.183 116.546,154.254 116.804,154.254 116.875,154.183 116.875,154.173 116.946,154.102 117.204,154.102 117.275,154.173 117.275,154.183 117.346,154.254 117.604,154.254 117.675,154.183 117.675,154.173 117.746,154.102 118.004,154.102 118.075,154.173 118.075,154.183 118.146,154.254 118.404,154.254 118.475,154.183 118.475,154.173 118.546,154.102 118.804,154.102 118.875,154.173 118.875,154.183 118.946,154.254 119.204,154.254 119.275,154.183 119.275,154.173 119.346,154.102 119.604,154.102 119.675,154.173 119.675,154.183 119.746,154.254 120.004,154.254 120.075,154.183 120.075,154.173 120.146,154.102 120.404,154.102 120.475,154.173 120.475,154.183 120.546,154.254 120.804,154.254 120.875,154.183 120.875,154.173 120.946,154.102 121.204,154.102 121.275,154.173 121.275,154.183 121.346,154.254 121.604,154.254 121.675,154.183 121.675,154.173 121.746,154.102 122.004,154.102 122.075,154.173 122.075,154.183 122.146,154.254 122.404,154.254 122.475,154.183 122.475,154.173 122.546,154.102 122.804,154.102 122.875,154.173 122.875,154.183 122.946,154.254 123.204,154.254 123.275,154.183 123.275,154.173 123.346,154.102 123.604,154.102 123.675,154.173 123.675,154.183 123.746,154.254 124.004,154.254 124.075,154.183 124.075,154.173 124.146,154.102 124.404,154.102 124.475,154.173 124.475,154.183 124.546,154.254 124.804,154.254 124.875,154.183 124.875,154.173 124.946,154.102 125.204,154.102 125.275,154.173 125.275,154.183 125.346,154.254 125.604,154.254 125.675,154.183 125.675,154.173 125.746,154.102 126.004,154.102 126.075,154.173 126.075,154.183 126.146,154.254 126.404,154.254 126.475,154.183 126.475,154.173 126.546,154.102 126.804,154.102 126.875,154.173 126.875,154.183 126.946,154.254 127.204,154.254 127.275,154.183 127.275,154.173 127.346,154.102 127.604,154.102 127.675,154.173 127.675,154.183 127.746,154.254 128.004,154.254 128.075,154.183 128.075,154.173 128.146,154.102 128.404,154.102 128.475,154.173 128.475,154.183 128.546,154.254 128.804,154.254 128.875,154.183 128.875,154.173 128.946,154.102 129.204,154.102 129.275,154.173 129.275,154.183 129.346,154.254 129.604,154.254 129.675,154.183 129.675,154.173 129.746,154.102 130.004,154.102 130.075,154.173 130.075,154.183 130.146,154.254 130.404,154.254 130.475,154.183 130.475,154.173 130.546,154.102 130.804,154.102 130.875,154.173 130.875,154.183 130.946,154.254 131.204,154.254 131.275,154.183 131.275,154.173 131.346,154.102 131.604,154.102 131.675,154.173 131.675,154.183 131.746,154.254 132.004,154.254 132.075,154.183 132.075,154.173 132.146,154.102 132.404,154.102 132.475,154.173 132.475,154.183 132.546,154.254 132.804,154.254 132.875,154.183 132.875,154.173 132.946,154.102 133.204,154.102 133.275,154.173 133.275,154.183 133.346,154.254 133.604,154.254 133.675,154.183 133.675,154.173 133.746,154.102 134.163,154.102 134.375,153.89 134.375,153.79 134.363,153.778 134.363,153.678 134.546,153.495 134.646,153.495 134.658,153.507 134.758,153.507 134.941,153.324 134.941,153.224 134.885,153.169 134.885,153.069 135.068,152.886 135.168,152.886 135.224,152.941 135.324,152.941 135.507,152.758 135.507,152.658 135.451,152.603 135.451,152.503 135.634,152.32 135.734,152.32 135.789,152.376 135.889,152.376 136.072,152.193 136.072,152.093 136.017,152.037 136.017,151.937 136.2,151.755 136.3,151.755 136.355,151.81 136.455,151.81 136.969,151.296 136.969,151.288 136.898,151.217 136.52,151.217 136.449,151.147 136.449,150.888 136.52,150.817 136.898,150.817 136.969,150.747 136.969,150.488 136.898,150.417 136.52,150.417 136.449,150.347 136.449,150.088 136.52,150.017 136.898,150.017 136.969,149.947 136.969,149.688 136.898,149.617 136.52,149.617 136.449,149.547 136.449,149.288 136.52,149.217 136.898,149.217 136.969,149.147 136.969,148.888 136.898,148.817 136.52,148.817 136.449,148.747 136.449,148.488 136.52,148.417 136.898,148.417 136.969,148.347 U5.34@136.969,147.425
SD_A10: U1.T7 U5.22 | length 45.1
  Top Layer w0.1: U1.T7@106.928,136.926 112.739,131.115 117.5,131.115 117.57,131.044 117.57,130.932 117.641,130.861 117.9,130.861 117.97,130.932 117.97,131.044 118.041,131.115 118.3,131.115 118.37,131.044 118.37,130.932 118.441,130.861 118.7,130.861 118.77,130.932 118.77,131.044 118.841,131.115 119.1,131.115 119.17,131.044 119.17,130.932 119.241,130.861 119.5,130.861 119.57,130.932 119.57,131.044 119.641,131.115 119.9,131.115 119.97,131.044 119.97,130.932 120.041,130.861 120.3,130.861 120.37,130.932 120.37,131.044 120.441,131.115 120.7,131.115 120.77,131.044 120.77,130.932 120.841,130.861 121.1,130.861 121.17,130.932 121.17,131.044 121.241,131.115 121.5,131.115 121.57,131.044 121.57,130.932 121.641,130.861 121.9,130.861 121.97,130.932 121.97,131.044 122.041,131.115 122.3,131.115 122.37,131.044 122.37,130.932 122.441,130.861 122.7,130.861 122.77,130.932 122.77,131.044 122.841,131.115 123.1,131.115 123.17,131.044 123.17,130.932 123.241,130.861 123.5,130.861 123.57,130.932 123.57,131.044 123.641,131.115 123.9,131.115 123.97,131.044 123.97,130.932 124.041,130.861 124.3,130.861 124.37,130.932 124.37,131.044 124.441,131.115 124.7,131.115 124.77,131.044 124.77,130.932 124.841,130.861 125.1,130.861 125.17,130.932 125.17,131.044 125.241,131.115 125.5,131.115 125.57,131.044 125.57,130.932 125.641,130.861 125.9,130.861 125.97,130.932 125.97,131.044 126.041,131.115 126.3,131.115 126.37,131.044 126.37,130.932 126.441,130.861 126.7,130.861 126.77,130.932 126.77,131.044 126.841,131.115 127.1,131.115 127.17,131.044 127.17,130.932 127.241,130.861 127.5,130.861 127.57,130.932 127.57,131.044 127.641,131.115 127.9,131.115 127.97,131.044 127.97,130.932 128.041,130.861 128.3,130.861 128.37,130.932 128.37,131.044 128.441,131.115 128.7,131.115 128.77,131.044 128.77,130.932 128.841,130.861 129.1,130.861 129.17,130.932 129.17,131.044 129.241,131.115 129.5,131.115 129.57,131.044 129.57,130.932 129.641,130.861 129.9,130.861 129.97,130.932 129.97,131.044 130.041,131.115 130.3,131.115 130.37,131.044 130.37,130.932 130.441,130.861 130.7,130.861 130.77,130.932 130.77,131.044 130.841,131.115 131.1,131.115 131.17,131.044 131.17,130.932 131.241,130.861 131.5,130.861 131.57,130.932 131.57,131.044 131.641,131.115 131.9,131.115 131.97,131.044 131.97,130.932 132.041,130.861 132.3,130.861 132.37,130.932 132.37,131.044 132.441,131.115 132.7,131.115 132.77,131.044 132.77,130.932 132.841,130.861 133.1,130.861 133.17,130.932 133.17,131.044 133.241,131.115 133.5,131.115 133.57,131.044 133.57,130.932 133.641,130.861 133.9,130.861 133.97,130.932 133.97,131.044 134.041,131.115 134.3,131.115 134.37,131.044 134.37,130.932 134.441,130.861 134.7,130.861 134.77,130.932 134.77,131.044 134.841,131.115 135.1,131.115 135.17,131.044 135.17,130.932 135.241,130.861 135.5,130.861 135.57,130.932 135.57,131.044 135.641,131.115 135.941,131.115 137.769,132.943 U5.22@137.769,136.141
SD_A11: U1.A8 U5.35 | length 44.2
  Top Layer w0.1: U1.A8@107.728,148.926 112.396,153.594 112.696,153.594 112.767,153.665 112.767,153.777 112.837,153.848 113.096,153.848 113.167,153.777 113.167,153.665 113.237,153.594 113.496,153.594 113.567,153.665 113.567,153.777 113.637,153.848 113.896,153.848 113.967,153.777 113.967,153.665 114.037,153.594 114.296,153.594 114.367,153.665 114.367,153.777 114.437,153.848 114.696,153.848 114.767,153.777 114.767,153.665 114.837,153.594 115.096,153.594 115.167,153.665 115.167,153.777 115.237,153.848 115.496,153.848 115.567,153.777 115.567,153.665 115.637,153.594 115.896,153.594 115.967,153.665 115.967,153.777 116.037,153.848 116.296,153.848 116.367,153.777 116.367,153.665 116.437,153.594 116.696,153.594 116.767,153.665 116.767,153.777 116.837,153.848 117.096,153.848 117.167,153.777 117.167,153.665 117.237,153.594 117.496,153.594 117.567,153.665 117.567,153.777 117.637,153.848 117.896,153.848 117.967,153.777 117.967,153.665 118.037,153.594 118.296,153.594 118.367,153.665 118.367,153.777 118.437,153.848 118.696,153.848 118.767,153.777 118.767,153.665 118.837,153.594 119.096,153.594 119.167,153.665 119.167,153.777 119.237,153.848 119.496,153.848 119.567,153.777 119.567,153.665 119.637,153.594 119.896,153.594 119.967,153.665 119.967,153.777 120.037,153.848 120.296,153.848 120.367,153.777 120.367,153.665 120.437,153.594 120.696,153.594 120.767,153.665 120.767,153.777 120.837,153.848 121.096,153.848 121.167,153.777 121.167,153.665 121.237,153.594 121.496,153.594 121.567,153.665 121.567,153.777 121.637,153.848 121.896,153.848 121.967,153.777 121.967,153.665 122.037,153.594 122.296,153.594 122.367,153.665 122.367,153.777 122.437,153.848 122.696,153.848 122.767,153.777 122.767,153.665 122.837,153.594 123.096,153.594 123.167,153.665 123.167,153.777 123.237,153.848 123.496,153.848 123.567,153.777 123.567,153.665 123.637,153.594 123.896,153.594 123.967,153.665 123.967,153.777 124.037,153.848 124.296,153.848 124.367,153.777 124.367,153.665 124.437,153.594 124.696,153.594 124.767,153.665 124.767,153.777 124.837,153.848 125.096,153.848 125.167,153.777 125.167,153.665 125.237,153.594 125.496,153.594 125.567,153.665 125.567,153.777 125.637,153.848 125.896,153.848 125.967,153.777 125.967,153.665 126.037,153.594 126.296,153.594 126.367,153.665 126.367,153.777 126.437,153.848 126.696,153.848 126.767,153.777 126.767,153.665 126.837,153.594 127.096,153.594 127.167,153.665 127.167,153.777 127.237,153.848 127.496,153.848 127.567,153.777 127.567,153.665 127.637,153.594 127.896,153.594 127.967,153.665 127.967,153.777 128.037,153.848 128.296,153.848 128.367,153.777 128.367,153.665 128.437,153.594 128.696,153.594 128.767,153.665 128.767,153.777 128.837,153.848 129.096,153.848 129.167,153.777 129.167,153.665 129.237,153.594 129.496,153.594 129.567,153.665 129.567,153.777 129.637,153.848 129.896,153.848 129.967,153.777 129.967,153.665 130.037,153.594 130.296,153.594 130.367,153.665 130.367,153.777 130.437,153.848 130.696,153.848 130.767,153.777 130.767,153.665 130.837,153.594 131.096,153.594 131.167,153.665 131.167,153.777 131.237,153.848 131.496,153.848 131.567,153.777 131.567,153.665 131.637,153.594 131.896,153.594 131.967,153.665 131.967,153.777 132.037,153.848 132.296,153.848 132.367,153.777 132.367,153.665 132.437,153.594 132.696,153.594 132.767,153.665 132.767,153.777 132.837,153.848 133.096,153.848 133.167,153.777 133.167,153.665 133.237,153.594 134.036,153.594 136.169,151.461 U5.35@136.169,147.425